# Altium PCB 1tg227.PcbDoc
Units mil, origin at the board's own origin, x right, y up, seen from the top; angles counter-clockwise.
Board outline 3795 x 3305 mil, 2 copper layers (Top Layer, Bottom Layer); 76 components, 54 nets, 275 pads, 570 vias.
Unrouted connection lines stored in the file: 1.
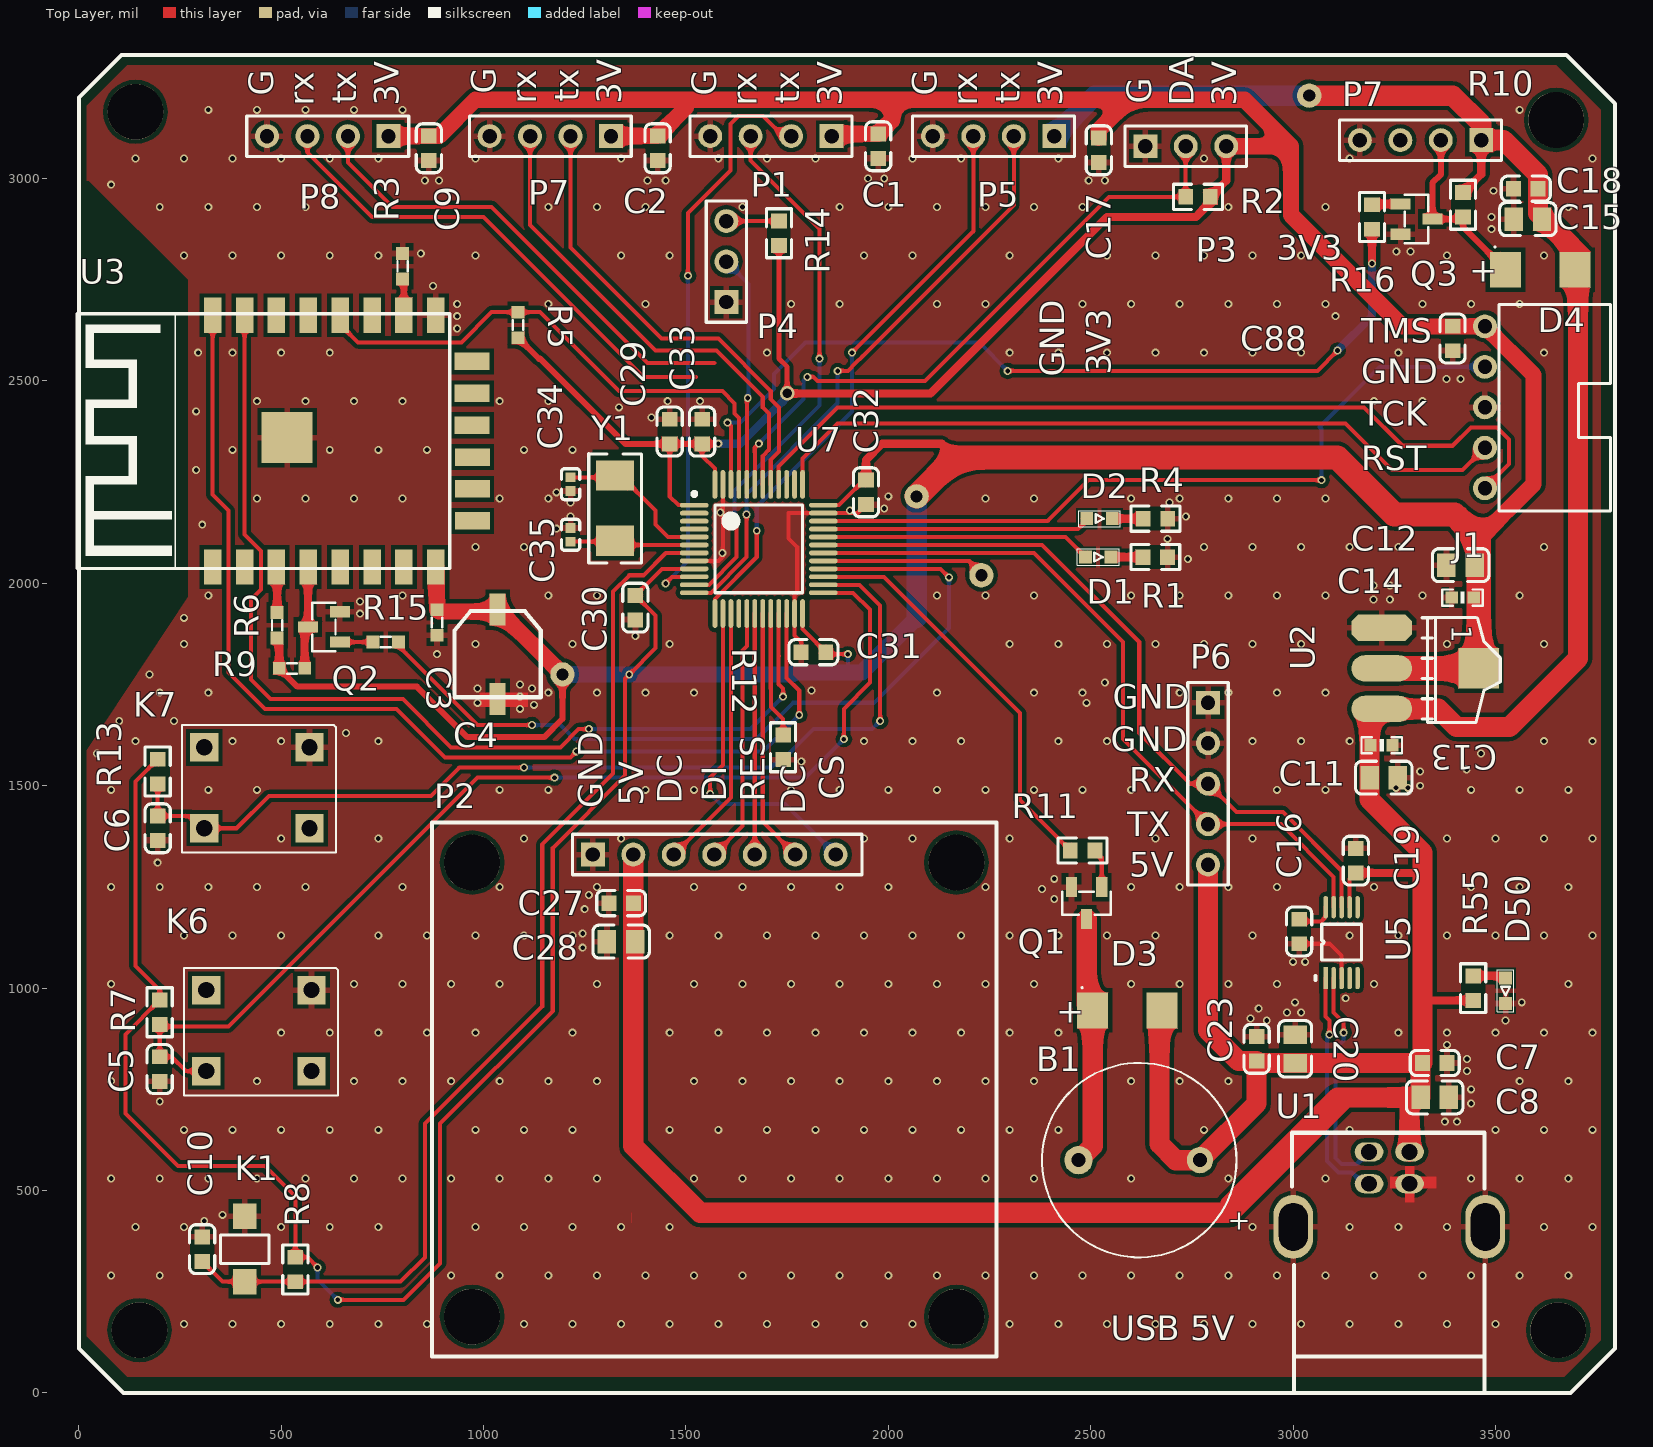
[diagram p0: Top Layer view]
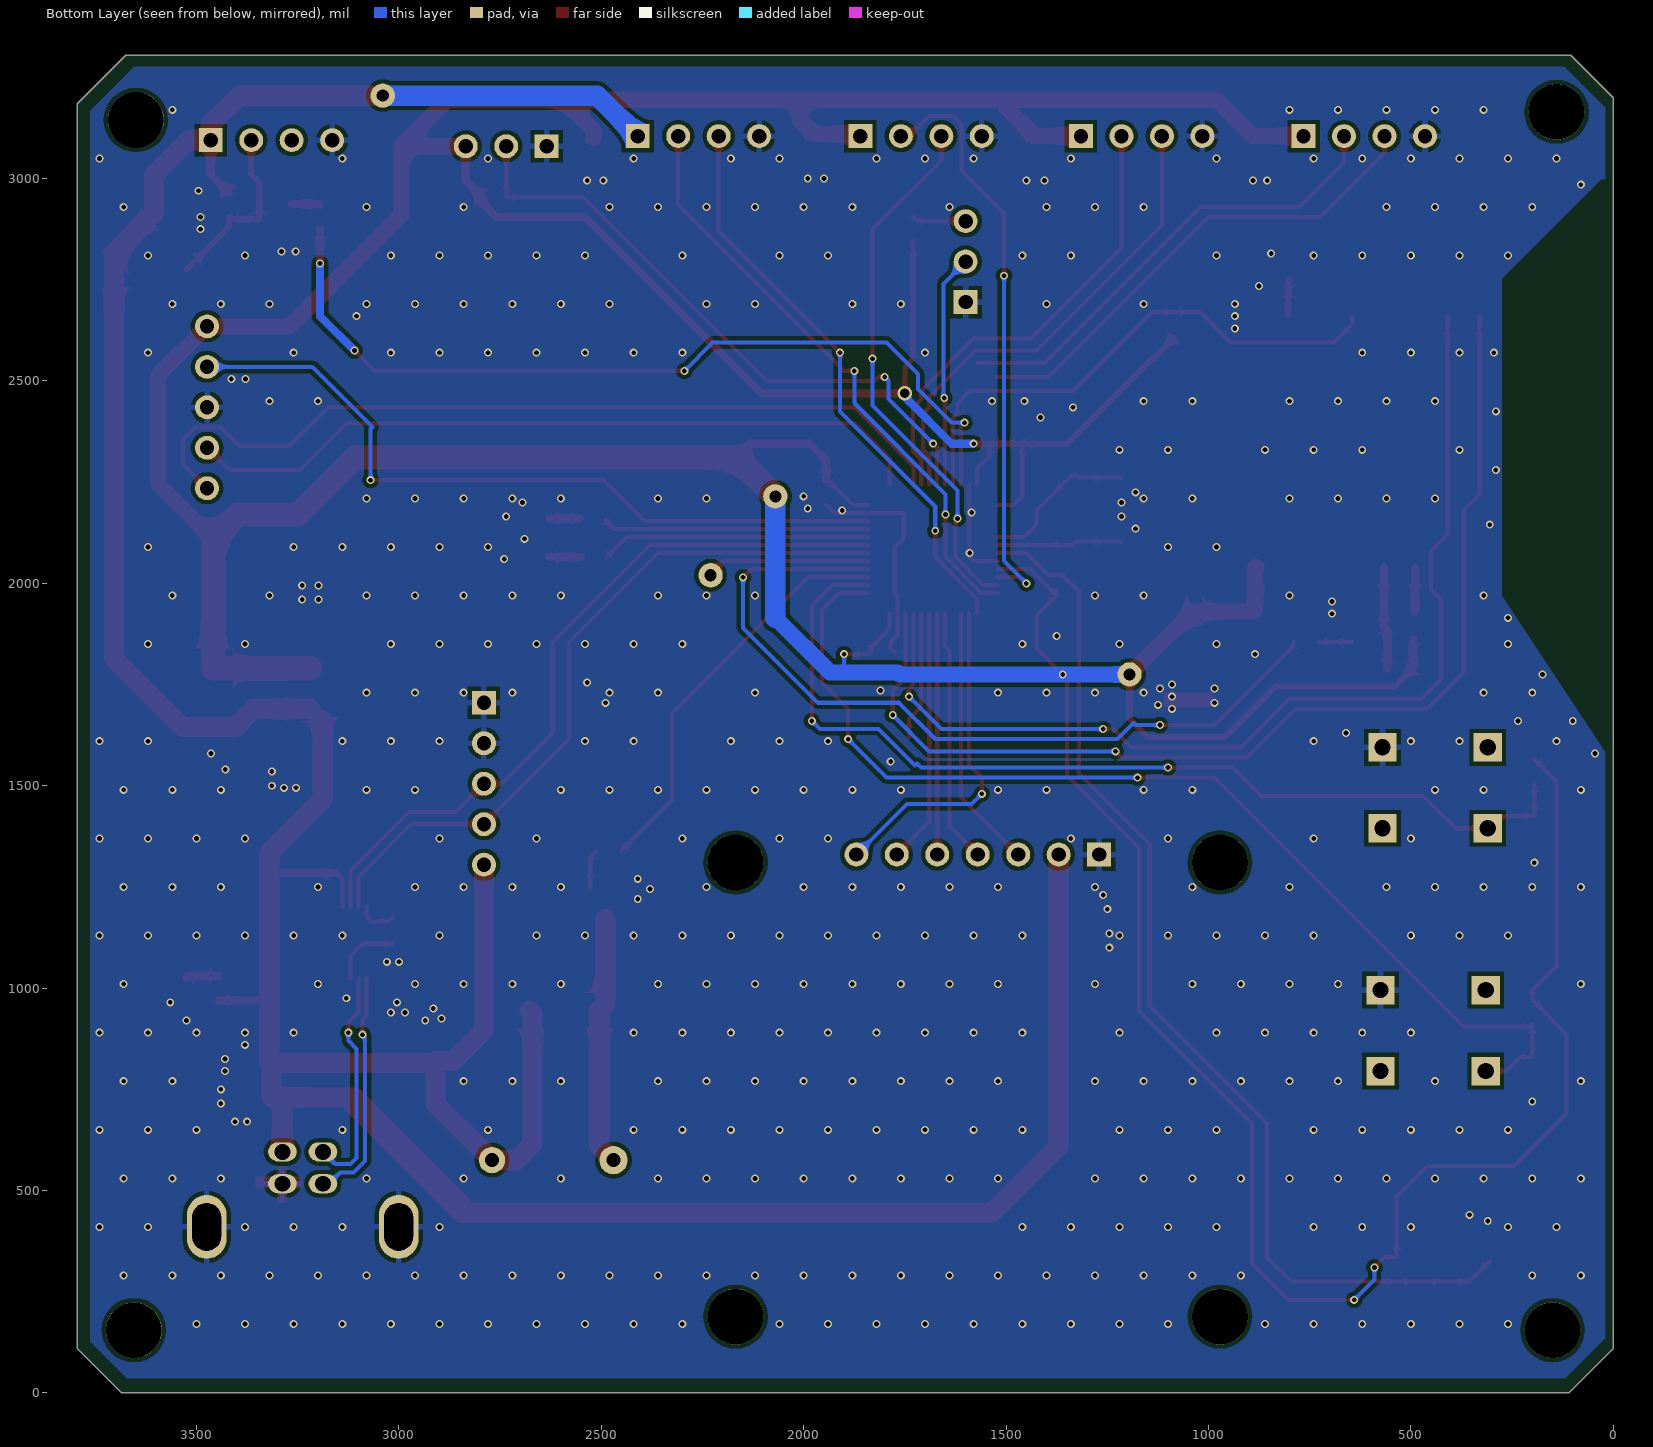
[diagram p1: Bottom Layer view, seen from below]
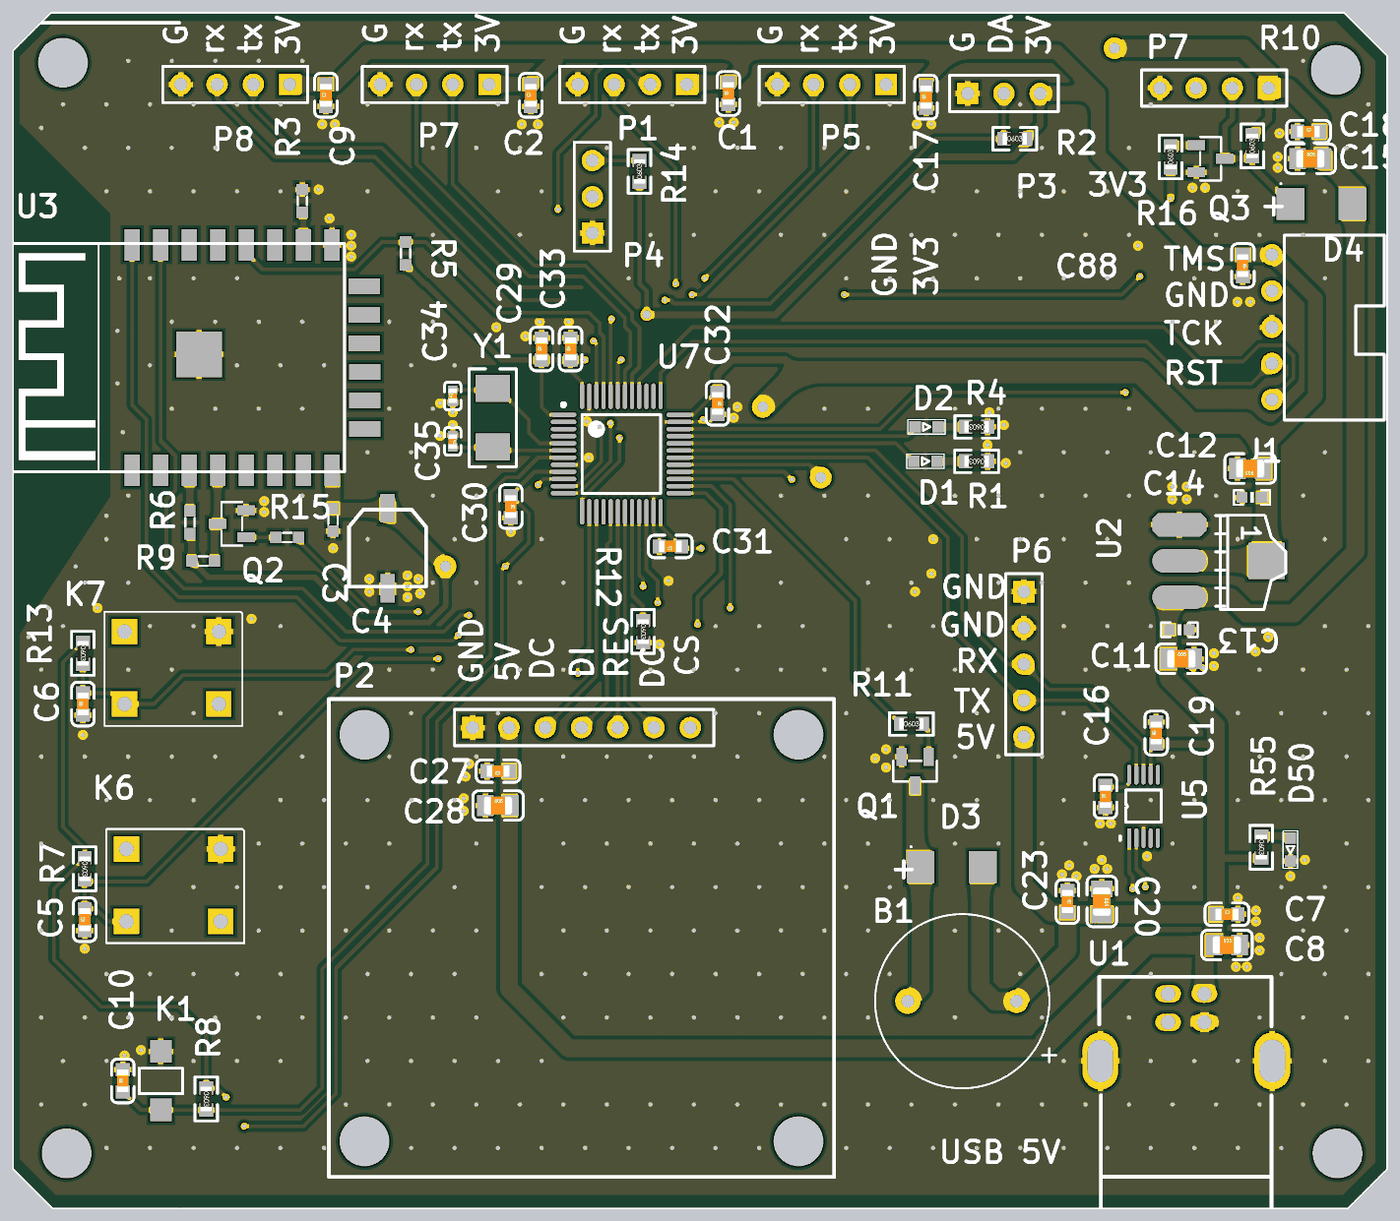
[diagram p2: 3D render of the assembled board from above, using the file's embedded part models]

## Layer stack, top to bottom
Top Solder: solder mask 0.4, Solder Resist, Dk 3.5
Top Layer: signal copper 1.4
Dielectric 1: dielectric 12.6, FR-4, Dk 4.8
Bottom Layer: signal copper 1.4
Bottom Solder: solder mask 0.4, Solder Resist, Dk 3.5

## Board outline
0,110 0,3200 105,3305 3675,3305 3795,3185 3795,110 3685,0 110,0

## Design rules (kind name [scope] priority, off if disabled: settings)
Clearance [All] p1: gap=10 ignorepadtopadclearanceinfootprint=FALSE except(0: Arc-Hole Track-Hole SMDPad-Hole THPad-Hole Via-Hole Fill-Hole Poly-Hole Region-Hole Text-Hole; 6: Arc-Arc Arc-Track Arc-SMDPad Track-Track Track-SMDPad SMDPad-SMDPad)
PolygonConnect [All] p1: thpad.connectstyle=Relief thpad.reliefconductorwidth=15 thpad.reliefentries=4 thpad.polygonreliefangle="90 Angle" thpad.airgapwidth=10 smdpad.connectstyle=Relief smdpad.reliefconductorwidth=15 smdpad.reliefentries=4 smdpad.polygonreliefangle="90 Angle" smdpad.airgapwidth=10 via.connectstyle=Direct via.reliefconductorwidth=10 via.reliefentries=4 via.polygonreliefangle="90 Angle" via.airgapwidth=10
RoutingVias [All] p1: holewidth=28 width=50 viastyle="Through Hole" minholewidth=28 minwidth=50 maxholewidth=28 maxwidth=50
SolderMaskExpansion [All] p1: expansion=4
Width [All] p1: maxlimit=100 minlimit=6 preferedwidth=10
30 further rules are at their usual default settings.

## Components (designator, comment, footprint, x,y, rotation, side; value= is the part's Value field where it differs from the comment)
B1 "Benk" 蜂鸣器 2770,575 r180 top
C1 "CAP_0.1UF_0603_FIRE" LC-0603_C 1975,3080 r90 top value=0.1UF
C2 "CAP_0.1UF_0603_FIRE" LC-0603_C 1430,3075 r90 top value=0.1UF
C3 "CAP_0.1UF_0603_FIRE" CAP_0603_FIRE 885,1872.01 r90 top value=0.1UF
C4 "CAP+_47UF_FIRE" CAP+_47UF_FIRE 1035,1825 r0 top value=47UF
C5 "CAP_0.1UF_0603_FIRE" LC-0603_C 200,800 r90 top value=0.1UF
C6 "CAP_0.1UF_0603_FIRE" LC-0603_C 195,1395 r90 top value=0.1UF
C7 "CAP_0.1UF_0603_FIRE" LC-0603_C 3350,815 r0 top value=0.1UF
C8 "104" LC-0805_C 3350,730 r0 top value=10uF
C9 "CAP_0.1UF_0603_FIRE" LC-0603_C 865,3075 r90 top value=0.1UF
C10 "CAP_0.1UF_0603_FIRE" LC-0603_C 305,355 r90 top value=0.1UF
C11 "104" LC-0805_C 3224.08,1520 r0 top value=10uF
C12 "104" LC-0805_C 3414.08,2045 r180 top value=10uF
C13 "104" 0603P 3219.08,1600 r180 top
C14 "104" 0603P 3419.08,1965 r0 top
C15 "104" LC-0805_C 3580,2900 r0 top value=10uF
C16 "CAP_0.1UF_0603_FIRE" LC-0603_C 3015,1140 r90 top value=0.1UF
C17 "CAP_0.1UF_0603_FIRE" LC-0603_C 2520,3070 r90 top value=0.1UF
C18 "CAP_0.1UF_0603_FIRE" LC-0603_C 3575,2975 r0 top value=0.1UF
C19 "CAP_0.1UF_0603_FIRE" LC-0603_C 3155,1315 r90 top value=0.1UF
C20 "104" LC-0805_C 3005,850 r270 top value=10uF
C23 "CAP_0.1UF_0603_FIRE" LC-0603_C 2910,850 r270 top value=0.1UF
C27 "CAP_0.1UF_0603_FIRE" LC-0603_C 1340,1210 r180 top value=0.1UF
C28 "104" LC-0805_C 1340,1115 r0 top value=10uF
C29 "CAP_0.1UF_0603_FIRE" LC-0603_C 1460,2375 r90 top value=0.1UF
C30 "CAP_0.1UF_0603_FIRE" LC-0603_C 1375,1940 r270 top value=0.1UF
C31 "CAP_0.1UF_0603_FIRE" LC-0603_C 1815,1830 r180 top value=0.1UF
C32 "CAP_0.1UF_0603_FIRE" LC-0603_C 1945,2225 r270 top value=0.1UF
C33 "CAP_0.1UF_0603_FIRE" LC-0603_C 1540,2375 r90 top value=0.1UF
C34 "C_22P_0603" LC-0402_C 1215,2245 r90 top value=20pF
C35 "C_22P_0603" LC-0402_C 1215,2120 r270 top value=20pF
C88 "CAP_0.1UF_0603_FIRE" LC-0603_C 3394.08,2605 r270 top value=0.1UF
D1 "LED_RED_0603_FIRE" LED_RED_0603_FIRE 2487.01,2065 r0 top value=RED
D2 "LED_RED_0603_FIRE" LED_RED_0603_FIRE 2490,2160 r0 top value=RED
D3 "IN5824" DO-214AC(SSxxx) 2595,945 r0 top
D4 "IN5824" DO-214AC(SSxxx) 3615,2775 r0 top
D50 "LED_RED_0603_FIRE" LED_RED_0603_FIRE 3525,1025 r270 top value=RED
J1 "XH2.54-5P" XH2.54-5P 3674.08,2335 r90 top
K1 "KEY" KEY_SW 410,275 r90 top
K6 "方型按键" key 445,895 r0 top
K7 "方型按键" key 440,1495 r0 top
P1 "HC-SR04" HDR1X4 1860,3105 r180 top
P2 "OLED_1.3" OLED_1.3 1270,1330 r0 top
P3 "Header 3" HDR1X3 2635,3080 r0 top
P4 "Header 3" HDR1X3 1600,2695 r90 top
P5 "HC-SR04" HDR1X4 2410,3105 r180 top
P6 "Header 5" HDR1X5 2790,1705 r270 top
P7 "Header 4" HDR1X4 3465,3095 r180 top
P7 "HC-SR04" HDR1X4 1315,3105 r180 top
P8 "HC-SR04" HDR1X4 765,3105 r180 top
Q1 "SI2302_C2891732" SOT-23-3_L2.9-W1.3-P1.90-LS2.4-BR 2490,1210 r90 top
Q2 "SI2302_C2891732" SOT-23-3_L2.9-W1.3-P1.90-LS2.4-BR 605.63,1892.4 r0 top
Q3 "SI2302_C2891732" SOT-23-3_L2.9-W1.3-P1.90-LS2.4-BR 3305,2900 r180 top
R1 "RES" LC-0603_R 2659.69,2065 r180 top value=1k
R2 "RES_10K_0603_FIRE" LC-0603_R 2765,2955 r0 top value=10K
R3 "RES_10K_0603_FIRE" RES_0603_FIRE 800,2815 r270 top value=10K
R4 "RES" LC-0603_R 2660,2160 r180 top value=1k
R5 "RES_10K_0603_FIRE" RES_0603_FIRE 1085,2607.01 r90 top value=10K
R6 "RES_10K_0603_FIRE" RES_0603_FIRE 490,1927.99 r270 top value=10K
R7 "RES" LC-0603_R 200,940.32 r270 top value=10K
R8 "RES_10K_0603_FIRE" LC-0603_R 535,305 r270 top value=10K
R9 "RES_10K_0603_FIRE" RES_0603_FIRE 557.99,1790 r180 top value=10K
R10 "RES" LC-0603_R 3420,2935.31 r90 top value=10k
R11 "RES" LC-0603_R 2480,1340 r0 top value=1k
R12 "RES" LC-0603_R 1740,1595 r270 top value=10k
R13 "RES" LC-0603_R 195,1535 r270 top value=10K
R14 "RES_10K_0603_FIRE" LC-0603_R 1730,2865 r90 top value=10K
R15 "RES_10K_0603_FIRE" RES_0603_FIRE 790,1855 r180 top value=10K
R16 "RES" LC-0603_R 3195,2905 r90 top value=1k
R55 "RES" LC-0603_R 3445,1000 r270 top value=1k
U1 "USB" USB-B 3237.8,595.43 r0 top
U2 "AMS1117-3.3" AMS1117 3219.14,1890.03 r270 top
U3 "ESP12-F" "ESP-12S Module" 606.39,2351.34 r90 top
U5 "CH340E" "SOP10 - duplicate" 3080.63,1024.8 r90 top
U7 "STM32F103C8T6" LQFP48_N 1680,2085 r0 top
Y1 "XTAL_8M_FIRE" OSC_8M 1325,2105 r90 top value=8MHz

## Footprints (in the part's own frame and the unit in brackets; to place one, negate y for a bottom-side part, rotate by r counter-clockwise, add the part's x,y. Pads: shape width x height; smd on the part's side, far side on the other; paste and mask are expansions set on the pad)
0603P [mil]
  rect 30x30 smd: 1(-27,0) 2(27.5,-0.06)
  silkscreen extent -50,-20 50,20
AMS1117 [mil]
  oct 65x150 smd: 1(0.03,-0.06)
  oval 65x150 smd: 2(100.03,-0.06) 3(200.03,-0.06)
  rect 100x100 smd: 4(100.03,239.94)
  silkscreen extent -26,100 234,293
CAP+_47UF_FIRE [mm]
  rect 1x2 smd: 1(0,2.8) 2(0,-2.8)
  silkscreen extent -2.7,-2.7 2.7,2.7
CAP_0603_FIRE [mm]
  rect 0.8x0.8 smd: 1(0,0) 2(1.6,0)
  silkscreen extent 0.5,-0.32 1.1,0.33
DO-214AC(SSxxx) [mm] "SODFL, 2-Leads, Body 2.70x5.45mm, IPC Medium Density"
  rect 1.95x2.25 smd: 1(-2.286,0) 2(2.075,0)
  silkscreen extent -3,1.38 -2.9,1.47, body extent -1.27,-1.42 1.02,1.4, height 2.56
"ESP-12S Module" [mm]
  rect 3.2x3.2 smd: 0(0.22,2.321)
  rect 2.2x1.1 smd: 1(7.9,-7) 2(7.9,-5) 3(7.9,-3) 4(7.9,-1) 5(7.9,1) 6(7.9,3) 7(7.9,5) 8(7.9,7) 9(-7.9,7) 10(-7.9,5) 11(-7.9,3) 12(-7.9,1) 13(-7.9,-1) 14(-7.9,-3) 15(-7.9,-5) 16(-7.9,-7)
  rect 1.1x2.2 smd: 17(-5,-9.297) 18(-3,-9.297) 19(-1,-9.297) 20(1,-9.271) 21(3,-9.271) 22(5,-9.271)
  silkscreen extent -8,-7.87 8,15.5
HDR1X3 [mm] "Connector; Header; 3 Position"
  rect 1.5x1.5 hole 0.9: 1(0,0)
  round 1.5 hole 0.9: 2(2.54,0) 3(5.08,0)
  silkscreen extent -1.27,-1.27 6.35,1.27
HDR1X4 [mm] "Connector; Header; 4 Position"
  rect 1.5x1.5 hole 0.9: 1(0,0)
  round 1.5 hole 0.9: 2(2.54,0) 3(5.08,0) 4(7.62,0)
  silkscreen extent -1.27,-1.27 8.89,1.27
HDR1X5 [mm] "Connector; Header; 5 Position"
  rect 1.5x1.5 hole 0.9: 1(0,0)
  round 1.5 hole 0.9: 2(2.54,0) 3(5.08,0) 4(7.62,0) 5(10.16,0)
  silkscreen extent -1.27,-1.27 11.43,1.27
key [mil]
  rect 70x70 hole 40: 1(-130,100) 2(-130,-100) 3(130,100) 4(130,-100)
  silkscreen extent -185,-160 195,155
KEY_SW [mm]
  rect 1.6x1.5 smd: 1(0,0) 2(4.1,0)
  silkscreen extent 1.14,-1.52 2.92,1.52
LC-0402_C [mm]
  rect 0.6x0.65 smd mask+0.051: 1(-0.425,0) 2(0.425,0)
  silkscreen extent -0.97,-0.58 0.97,0.58, body extent -0.48,-0.3 0.52,0.3, height 0.2
LC-0603_C [mm]
  rect 0.93x0.98 smd: 1(-0.77,0) 2(0.77,0)
  silkscreen extent -1.53,-0.79 1.54,0.79, body extent -0.8,-0.4 0.8,0.4, height 0.3
LC-0603_R [mm]
  rect 0.93x0.98 smd: 1(-0.77,0) 2(0.77,0)
  silkscreen extent -1.53,-0.79 1.54,0.79, body extent -0.85,-0.4 0.85,0.4, height 0.56
LC-0805_C [mm]
  rect 1.16x1.47 smd: 1(-0.89,0) 2(0.89,0)
  silkscreen extent -1.77,-1.04 1.77,1.04, body extent -1,-0.62 1,0.63, height 0.77
LED_RED_0603_FIRE [mm]
  rect 0.8x0.8 smd: A(0,0) K(1.6,0)
  silkscreen extent -0.51,-0.51 2.11,0.51
LQFP48_N [mm] "Thin QFP, 48-Leads, Body 7x7mm, Pitch 0.5mm, IPC Medium Density"
  oval 1.8x0.3 smd: 1(-4.05,2.75) 2(-4.05,2.25) 3(-4.05,1.75) 4(-4.05,1.25) 5(-4.05,0.75) 6(-4.05,0.25) 7(-4.05,-0.25) 8(-4.05,-0.75) 9(-4.05,-1.25) 10(-4.05,-1.75) 11(-4.05,-2.25) 12(-4.05,-2.75) 25(4.05,-2.75) 26(4.05,-2.25) 27(4.05,-1.75) 28(4.05,-1.25) 29(4.05,-0.75) 30(4.05,-0.25) 31(4.05,0.25) 32(4.05,0.75) 33(4.05,1.25) 34(4.05,1.75) 35(4.05,2.25) 36(4.05,2.75)
  oval 0.3x1.8 smd: 13(-2.75,-4.05) 14(-2.25,-4.05) 15(-1.75,-4.05) 16(-1.25,-4.05) 17(-0.75,-4.05) 18(-0.25,-4.05) 19(0.25,-4.05) 20(0.75,-4.05) 21(1.25,-4.05) 22(1.75,-4.05) 23(2.25,-4.05) 24(2.75,-4.05) 37(2.75,4.05) 38(2.25,4.05) 39(1.75,4.05) 40(1.25,4.05) 41(0.75,4.05) 42(0.25,4.05) 43(-0.25,4.05) 44(-0.75,4.05) 45(-1.25,4.05) 46(-1.75,4.05) 47(-2.25,4.05) 48(-2.75,4.05)
  silkscreen extent -4.17,-2.75 2.75,3.57, body extent -3.5,-3.5 3.5,3.5, height 1.6
OLED_1.3 [mm] "Connector; Header; 9 Position"
  round 3.5 hole 3.5 unplated: 0(-7.58,-29) 0(-7.58,-0.5) 0(22.82,-29) 0(22.82,-0.5)
  rect 1.5x1.5 hole 0.9: 1(0,0)
  round 1.5 hole 0.9: 2(2.54,0) 3(5.08,0) 4(7.62,0) 5(10.16,0) 6(12.7,0) 7(15.24,0)
  silkscreen extent -10.08,-31.5 25.32,2
OSC_8M [mm]
  rect 1.9x2.4 smd: 1(0,0) 2(4.1,0)
  silkscreen extent -1.4,-1.65 5.46,1.65
RES_0603_FIRE [mm]
  rect 0.8x0.8 smd: 1(0,0) 2(1.6,0)
  silkscreen extent 0.5,-0.32 1.1,0.33
"SOP10 - duplicate" [mm]
  rect 1.4x0.28 smd: 1(0,0)
  oval 1.4x0.28 smd: 2(0,-0.5) 3(0,-1) 4(0,-1.5) 5(0,-2) 6(4.45,-2) 7(4.45,-1.5) 8(4.45,-1) 9(4.45,-0.5) 10(4.45,0)
  silkscreen extent -0.13,-2.25 3.38,0.64
SOT-23-3_L2.9-W1.3-P1.90-LS2.4-BR [mm]
  rect 1.25x0.7 smd: 1(1,-0.95) 2(1,0.95) 3(-1,0)
  silkscreen extent -0.73,-1.53 0.73,1.53
USB-B [mm]
  oval 1.8x1.2 hole 1: 1(1.27,0) 2(-1.27,0) 3(-1.27,-2) 4(1.27,-2)
  oval 2.5x4 hole 1.8 slot 3 at 90 deg: 5(-6.025,-4.71) 6(6.025,-4.71)
  silkscreen extent -6.1,-15.13 5.97,1.2
XH2.54-5P [mm]
  round 1.5 hole 0.9: 1(-2.54,5.08) 2(0,5.08) 3(2.54,5.08) 4(5.08,5.08) 5(7.62,5.08)
  silkscreen extent -3.96,-2.79 8.99,4.21
蜂鸣器 [mil]
  round 65 hole 35: 1(0,0)
  round 70 hole 35: 2(300,0)
  silkscreen extent -90,-240 390,240

## Part data
C1 C2 C3 C5 C6 C7 C9 C10 C16 C17 C18 C19 C23 C27 C29 C30 C31 C32 C33 C88: "SURFACE MOUNT CAPACITOR 0.031 X 0.061 INCHES", PCB DECAL=CAP_0603_FIRE
C8 C11 C12 C15 C20 C28: library part Cap, "Capacitor", LatestRevisionDate=17-Jul-2002, LatestRevisionNote="Re-released for DXP Platform.", PackageDescription="Radial Cap, Thru-Hole; 2 Leads; 0.3 in Pin Spacing", PackageReference=RAD-0.3, Published=8-Jun-2000, Publisher="Altium Limited"
C13 C14: library part C
C34 C35: library part CAP_0.1UF_0603_FIRE, "SURFACE MOUNT CAPACITOR 0.031 X 0.061 INCHES", PCB DECAL=CAP_0603_FIRE
D1 D2 D50: "red,0805", PCB DECAL=LED_RED_0603_FIRE
K6 K7: library part Component_1
P1 P5 P7 P8: library part "Header 4", "Header, 4-Pin", LatestRevisionDate=17-Jul-2002, LatestRevisionNote="Re-released for DXP Platform.", Publisher="Altium Limited"
P3 P4: "Header, 3-Pin", LatestRevisionDate=17-Jul-2002, LatestRevisionNote="Re-released for DXP Platform.", Publisher="Altium Limited"
P6: "Header, 5-Pin", LatestRevisionDate=17-Jul-2002, LatestRevisionNote="Re-released for DXP Platform.", Publisher="Altium Limited"
P7: "Header, 4-Pin", LatestRevisionDate=17-Jul-2002, LatestRevisionNote="Re-released for DXP Platform.", Publisher="Altium Limited"
Q1 Q2 Q3: BOM_JLCPCB Part Class="Extended Part", BOM_Manufacturer=YONGYUTAI(永裕泰), BOM_Manufacturer Part=SI2302, BOM_Supplier=LCSC, BOM_Supplier Part=C2891732, Contributor=LCSC, spicePre=Q, spiceSymbolName=SI2302_C2891732
R2 R3 R5 R6 R8 R9 R14 R15: "SURFACE MOUNT RESISTOR 0.031 X 0.061 INCHES, 1/10W", Assembly=SMD, PCB DECAL=RES_0603_FIRE
U1: library part USB-B
U2: library part AMS1117
U7: "STM32 ARM-based 32-bit MCU Performance Line with 64 kB Flash, 20 kB Internal RAM, -40 to +85癈 Temperature, 48-Pin LQFP, Tray", ComponentLink1Description="Manufacturer URL", ComponentLink1URL=http://www.st.com/, ComponentLink2Description="STM32F103 Datasheet", ComponentLink2URL=http://www.st.com/internet/com/TECHNICAL_RESOURCES/TECHNICAL_LITERATURE/DATASHEET/CD00161566.pdf, ComponentLink3Description="STM32 Family Web Page", ComponentLink3URL=www.st.com/stm32, DatasheetVersion="rev13.0, Apr-2011", PackageDescription="48-Pin Low-Profile Quad Flat Pack, 7 x 7 mm Body, 0.5 mm Pitch (LQFP48)", PackageReference=LQFP48, PackageVersion="rev13, Apr-2011"
Y1: "CRYSTAL", PCB DECAL=CRYSTAL_SMD_FIRE
C4: PCB DECAL=CAP+_47UF_FIRE
J1: PCB DECAL=XH2.54-5P

## Free pads (board coordinates)
  round 137.8 hole 137.8 unplated: 0(140,3165) 0(150,155) 0(3650,3145) 0(3655,155)
  round 60 hole 30: 1(2070,2215) 1(2230,2020) 1(3040,3205) 2(1195,1775)

## Via types
v1: diameter 19.68, hole 11.81, Top Layer to Bottom Layer, tented both sides, 440 vias
v2: diameter 19.68, hole 11.81, Top Layer to Bottom Layer, 129 vias
v3: diameter 35.43, hole 23.62, Top Layer to Bottom Layer, 1 vias

## Nets (pads, with @x,y where several pads share a name; then routed paths per layer and width w, separated by ;. In a path a pad name is that pad's centre, name@x,y a point inside that pad or via, vN(x,y) a via of type N, cw(c..) or ccw(c..) an arc to the next point about the centre after c; other vN are vias at no path point)
beek: R11.1 U7.27 | length 1016.4
  Top Layer w10: U7.27 1988.9,2016.1 2325,1680 2325,1464.69 R11.1
BOOT0: P4.2 U7.44 | length 579.7
  Top Layer w10: U7.44 1650.47,2455.47 v2(1652.74,2457.74)
  Bottom Layer w10: P4.2 1655,2740 1655,2457.74 1652.74,2455.47 v2(1652.74,2457.74)
DHT11: P3.2 R2.1 U7.43 | length 1571.8
  Top Layer w10: U7.43 1670.16,2324.84 1670,2325 1670,2335 v2(1680,2345) ; v2(1800,2510) 1815,2510 1824.84,2500.16 2090.16,2500.16 2545,2955 R2.1 2734.69,3079.69 P3.2
  Bottom Layer w10: v2(1680,2345) 1790,2455 1790,2500 v2(1800,2510)
Echo_1: P1.3 U7.11 | length 1312.2
  Top Layer w10: U7.11 1556.55,1996.42 1625,2064.87 1625,2155 v2(1620,2160) ; P1.3@1660,3085 1660,3045 1830,2875 v2(1830,2555)
  Bottom Layer w10: v2(1620,2160) 1620,2230 1830,2440 v2@1830,2554.84
Echo_3: P7.3@1115,3105 U7.42 | length 1199.1
  Top Layer w10: P7.3@1115,3105 1115,2885 1425,2575 1575,2575 1689.84,2460.16 1689.84,2435 1705,2419.84 1705,2330.16 1689.84,2315 U7.42
Echo_4: P8.3 | length 1229.9
  Top Layer w10: P8.3 565,3065 725,2905 1000,2905 1395,2510 1525,2510
GND: C1.1 C2.1 C3.1 C4.2 C5.1 C6.1 C7.2 C8.2 C9.1 C10.2 C11.2 C12.2 C13.1 C14.1 C15.1 C16.1 C17.1 C18.1 C19.2 C20.1 C23.1 C27.2 C28.1 C29.2 C30.2 C31.2 C32.2 C33.2 C34.1 C35.1 C88.2 D50.K J1.3 K1.2 K6.3 K7.3 P1.4 P2.1 P3.1 P4.1 P5.4 P6.1 P6.2 P7.4 P8.4 Q1.2 Q2.2 Q3.2 R1.1 R3.1 R4.1 R12.2 U1.4 U1.5 U1.6 U2.1 U3.0 U3.1 U5.3 U7.8 U7.23 U7.35 U7.47 | length 992.8
  Top Layer w10: U7.8 1521.02,2055 1580,2055 1591.42,2066.42 U7.47 ; C31.2@1774.37,1830 1785,1840.63 1785,1855 1768.58,1871.42 U7.23 1768.58,1971.3 1775,1977.71 1775,2090 1753.58,2111.42 1753.58,2173.58 U7.35 1923.9,2173.58 C32.2 ; C16.1 3090.31,1109.68 3120,1080 U5.3
  other v1: 260,170 380,170 500,170 620,170 740,170 860,170 1100,170 1220,170 1340,170 1460,170 1580,170 1700,170 1820,170 1940,170 2060,170 2300,170 2420,170 2540,170 2660,170 2780,170 2900,170 3020,170 3140,170 3260,170 3380,170 3500,170 80,290 200,290 920,290 1040,290 1160,290 1280,290 1400,290 1520,290 1640,290 1760,290 1880,290 2000,290 2120,290 2240,290 2360,290 2480,290 2600,290 2720,290 2840,290 2960,290 3080,290 3200,290 3320,290 3440,290 3560,290 3680,290 140,410 260,410 500,410 620,410 740,410 980,410 1100,410 1220,410 1340,410 1460,410 2900,410 3140,410 3260,410 3380,410 3620,410 3740,410 80,530 200,530 320,530 440,530 560,530 680,530 800,530 920,530 1040,530 1160,530 1280,530 1520,530 1640,530 1760,530 1880,530 2000,530 2120,530 2240,530 2360,530 2600,530 2840,530 3080,530 3440,530 3560,530 3680,530 260,650 380,650 500,650 620,650 740,650 980,650 1100,650 1220,650 1460,650 1580,650 1700,650 1820,650 1940,650 2060,650 2180,650 2300,650 2420,650 2780,650 3140,650 3500,650 3620,650 3740,650 80,770 440,770 680,770 800,770 920,770 1040,770 1160,770 1280,770 1520,770 1640,770 1760,770 1880,770 2000,770 2120,770 2240,770 2360,770 2600,770 2720,770 2840,770 3560,770 3680,770 500,890 620,890 740,890 860,890 980,890 1220,890 1460,890 1580,890 1700,890 1820,890 1940,890 2060,890 2180,890 2300,890 2420,890 3260,890 3380,890 3500,890 3620,890 3740,890 80,1010 680,1010 800,1010 920,1010 1040,1010 1280,1010 1520,1010 1640,1010 1760,1010 1880,1010 2000,1010 2120,1010 2240,1010 2360,1010 2600,1010 2720,1010 2840,1010 2960,1010 3200,1010 3680,1010 260,1130 380,1130 500,1130 740,1130 860,1130 980,1130 1100,1130 1220,1130 1460,1130 1580,1130 1700,1130 1820,1130 1940,1130 2060,1130 2180,1130 2300,1130 2420,1130 2540,1130 2660,1130 2900,1130 3140,1130 3260,1130 3380,1130 3500,1130 3620,1130 3740,1130 80,1250 200,1250 320,1250 440,1250 560,1250 800,1250 1040,1250 1280,1250 1520,1250 1640,1250 1760,1250 1880,1250 2000,1250 2240,1250 2600,1250 2720,1250 2840,1250 2960,1250 3200,1250 3440,1250 3560,1250 3680,1250 500,1370 740,1370 1100,1370 1340,1370 1940,1370 2060,1370 2300,1370 2660,1370 2900,1370 3380,1370 3500,1370 3620,1370 3740,1370 80,1490 320,1490 440,1490 1040,1490 1160,1490 1400,1490 1520,1490 1760,1490 1880,1490 2000,1490 2120,1490 2240,1490 2360,1490 2480,1490 2600,1490 2960,1490 3080,1490 3440,1490 3560,1490 3680,1490 45,1580 140,1610 380,1610 500,1610 740,1610 1940,1610 2060,1610 2180,1610 2420,1610 2540,1610 2900,1610 3020,1610 3140,1610 3620,1610 3740,1610 100,1660 200,1730 320,1730 1160,1730 1280,1730 1400,1730 1520,1730 2120,1730 2360,1730 2480,1730 2720,1730 2840,1730 2960,1730 3080,1730 175,1775 260,1850 980,1850 1220,1850 1460,1850 2300,1850 2420,1850 2660,1850 2780,1850 2900,1850 3020,1850 3380,1850 3620,1850 260,1915 320,1970 800,1970 1160,1970 1280,1970 2120,1970 2240,1970 2360,1970 2600,1970 2720,1970 2840,1970 2960,1970 3080,1970 3320,1970 3560,1970 980,2090 1100,2090 2780,2090 2900,2090 3020,2090 3140,2090 3260,2090 3620,2090 305,2145 440,2210 560,2210 680,2210 800,2210 1040,2210 1160,2210 2240,2210 2360,2210 2600,2210 2720,2210 2840,2210 2960,2210 3080,2210 290,2280 380,2330 620,2330 740,2330 860,2330 1100,2330 1220,2330 290,2425 440,2450 560,2450 680,2450 800,2450 1040,2450 1160,2450 3200,2450 3320,2450 295,2570 380,2570 500,2570 620,2570 1700,2570 2300,2570 2420,2570 2540,2570 2660,2570 2780,2570 2900,2570 3020,2570 3260,2570 3620,2570 1160,2690 1400,2690 1760,2690 1880,2690 2120,2690 2240,2690 2480,2690 2600,2690 2720,2690 2840,2690 2960,2690 3080,2690 3320,2690 3440,2690 3560,2690 260,2810 380,2810 500,2810 620,2810 740,2810 980,2810 1340,2810 1460,2810 1940,2810 2060,2810 2300,2810 2540,2810 2660,2810 2780,2810 2900,2810 3020,2810 3380,2810 3620,2810 200,2930 320,2930 440,2930 560,2930 1160,2930 1280,2930 1400,2930 1640,2930 1880,2930 2000,2930 2120,2930 2240,2930 2360,2930 2480,2930 2840,2930 3080,2930 3680,2930 80,2985 140,3050 260,3050 380,3050 500,3050 620,3050 740,3050 980,3050 1340,3050 1580,3050 1700,3050 1820,3050 2060,3050 2180,3050 2420,3050 2780,3050 3140,3050 3740,3050 320,3170 440,3170 560,3170 680,3170 800,3170 3560,3170
  other v2: 310,425 355,440 3375,670 3405,670 3440,715 200,720 3440,750 3430,795 3430,825 3380,860 2935,920 3525,920 2895,925 2985,940 3020,940 2915,950 3005,965 3565,965 3130,975 3000,1065 3030,1065 1245,1100 1245,1135 1250,1195 2410,1220 1260,1230 2380,1245 2410,1270 195,1310 3254.08,1495 3284.08,1495 3314.08,1500 3314.08,1535 3429.08,1540 1785,1560 3464.08,1580 660,1630 235,1660 1090,1690 1125,1700 985,1705 2490,1705 1090,1720 1810,1735 985,1740 1120,1740 1090,1750 2535,1755 885,1825 2540,1850 1375,1870 695,1925 695,1955 3199.08,1960 3239.08,1960 3199.08,1995 3239.08,1995 2740,2060 1590,2075 2690,2110 1180,2135 1215,2165 2735,2165 1585,2175 1905,2180 1990,2185 1215,2200 2695,2200 2000,2215 1180,2225 1415,2410 1335,2435 1455,2450 1535,2450 3379.08,2505 3414.08,2505 935,2630 935,2660 3105,2660 935,2690 875,2735 845,2815 3255,2820 3290,2820 3490,2875 3490,2905 3495,2970 855,2995 890,2995 1405,2995 1450,2995 2495,2995 2535,2995 1950,3000 1990,3000
humi_pwm: R16.1 U7.46 | length 2151.3
  Top Layer w10: v2(1603.05,2396.95) 1611.1,2388.9 U7.46 ; v2(2295,2525) 3060,2525 v2(3110,2575)
  Top Layer w20: v2(3195,2790) R16.1
  Bottom Layer w10: v2(1603.05,2396.95) 1634.58,2396.95 1717.28,2479.66 1717.28,2517.28 1794.84,2594.84 2225.16,2594.84 v2(2295,2525)
  Bottom Layer w20: v2(3110,2575) 3195,2660 v2(3195,2790)
KEY_5: C5.2 K6.2 R7.2 U7.25 | length 2673.2
  Top Layer w10: R7.2 R7.2@200,905 ; K6.2 265,795 229.68,830.32 C5.2 R7.2@200,905 ; v2(1175,1520) 985,1520 370,905 R7.2@200,905 ; U7.25 1913.27,1976.73 1955,1935 1955,1755 1890.13,1690.13 v2(1890.13,1615)
  Bottom Layer w10: v2(1175,1520) 1795.13,1520 v2(1890.13,1615)
KEY_6: C6.2 K7.2 R13.2 U7.26 | length 2437.7
  Top Layer w10: R13.2 C6.2 279.68,1425.32 K7.2 390,1395 470,1475 870,1475 940,1545 v2(1100,1545) ; U7.26 1928.58,1996.42 1980,1945 v2(1980,1660)
  Bottom Layer w10: v2(1100,1545) 1710,1545 1720,1555 1725,1550 1815,1640 1960,1640 v2(1980,1660)
LED1: D1.A U7.32 | length 668.1
  Top Layer w10: U7.32 2437.48,2114.53 D1.A
LED2: D2.A U7.33 | length 659.2
  Top Layer w10: U7.33 2469.21,2134.21 D2.A@2490,2155
LED3: pad.1@2230,2020 U7.29 | length 396.1
  Top Layer w10: U7.29 2199.53,2055.47 pad.1@2225,2030
NetB1_2: B1.2 D3.1 Q1.3 | length 616.3
  Top Layer w50: B1.2 2505,610 D3.1 2490,960 Q1.3
NetC16_2: C16.2 U5.10 | length 98.7
  Top Layer w10: C16.2@3015,1175.32 3025.31,1165 3070,1165 3080.63,1175.63 U5.10
NetD1_K: D1.K R1.2 | length 79.4
  Top Layer w20: D1.K R1.2
NetD2_K: D2.K R4.2 | length 76.7
  Top Layer w20: D2.K R4.2
NetD4_1: D4.1 P7.2@3365,3095 Q3.3 R10.1 | length 454.7
  Top Layer w10: R10.1@3415,2900 R10.1
  Top Layer w15: P7.2@3365,3095 3365,3010 3344.37,2989.37 Q3.3 R10.1@3415,2900 ; R10.1 3420,2880 D4.1
NetD50_A: D50.A R55.1 | length 82.2
  Top Layer w20: R55.1 3519.69,1030.31 D50.A
NetP4_3: P4.3 R14.2 | length 134.3
  Top Layer w10: P4.3 1719.68,2895 R14.2@1730,2905.32
NetQ1_1: Q1.1 R11.2 | length 97.7
  Top Layer w10: R11.2 2527.4,1322.91 Q1.1
NetQ2_1: Q2.1 R15.2 | length 82
  Top Layer w10: Q2.1 R15.2
NetQ2_3: Q2.3 R9.1 U3.9 U3.12 | length 254.1
  Top Layer w10: Q2.3@557.99,1884.13 Q2.3 ; U3.12@566.26,2039.56 U3.12
  Top Layer w20: R9.1 Q2.3@557.99,1884.13 ; Q2.3 U3.12@566.26,2039.56
NetQ3_1: Q3.1 R16.2 | length 71.5
  Top Layer w20: R16.2 3197.09,2937.4 Q3.1
NetR3_2: R3.2 U3.2 | length 89
  Top Layer w15: R3.2@800,2750 803.24,2746.76 U3.2
NetR6_1: R6.1 U3.11 | length 113
  Top Layer w10: U3.11 U3.11@490,2038.6
  Top Layer w20: R6.1 U3.11@490,2038.6
NetR12_1: R12.1 U7.20 | length 318.2
  Top Layer w10: U7.20 1709.53,1740.79 1710,1740.31 1710,1695 1740,1665 R12.1 R12.1@1740,1620
NRST: C10.1 K1.1 R8.2 U7.7 | length 2673.3
  Top Layer w10: C10.1 354.68,275 K1.1 410.32,274.68 R8.2 794.68,274.68 855,335 855,665 1145,955 1145,1355 1320,1530 1320,1980 1360,2020 1395,2020 1450.16,2075.16 U7.7
OLED_CS: P2.7 U7.14 | length 830.7
  Top Layer w10: v2(1560,1480) 1560,1520 1591.42,1551.42 U7.14
  Bottom Layer w10: v2(1560,1480) 1585,1455 1745,1455 P2.7
OLED_DC: P2.6 U7.19 | length 628.8
  Top Layer w10: U7.19 1689.84,1410.16 P2.6
OLED_DI: P2.4 U7.17 | length 628.9
  Top Layer w10: P2.4 1640,1400 1640,1834.53 1650.47,1845 U7.17
OLED_DO: P2.3 U7.15 | length 654
  Top Layer w10: P2.3 1611.1,1471.1 U7.15
OLED_RES: P2.5 U7.18 | length 595.6
  Top Layer w10: P2.5 1670,1925.39 U7.18
OSC_IN: C34.2 U7.5 Y1.2 | length 390.9
  Top Layer w10: C34.2 1320.32,2261.73 Y1.2 1338.58,2266.42 1425,2180 1425,2145 1455.47,2114.53 U7.5
OSC_OUT: C35.2 U7.6 Y1.1 | length 310.5
  Top Layer w10: C35.2 1323.27,2103.27 Y1.1 1335.16,2094.84 U7.6
RESET: J1.1 U7.40 | length 2125
  Top Layer w10: U7.40 1729.21,2289.21 1875,2435 3175,2435 3270,2340 3394.08,2340 3439.08,2385 3504.08,2385 3533.78,2355.29 3533.78,2294.71 J1.1
SPI_MISO: U7.16
TCK: J1.2 U7.37 | length 1856
  Top Layer w10: U7.37 1788.27,2308.27 1875,2395 3130,2395 3245,2280 3419.08,2280 J1.2
TMS: J1.4 U7.34 | length 1876.3
  Top Layer w10: U7.34 2393.9,2153.9 2495,2255 v2(3070,2255)
  Bottom Layer w10: v2(3070,2255) 3070,2380.92 3065,2385.92 3214.08,2535 J1.4
Trig_1: P1.2 U7.10 | length 1465.8
  Top Layer w10: v2(1450,2000) 1466.1,2016.1 U7.10 ; v2(1505,2760) 1505,2915 1610,3020 1610,3135 1630,3155 1690,3155 P1.2@1760,3085
  Bottom Layer w10: v2(1450,2000) 1505,2055 v2(1505,2760)
Trig_3: P7.2@1215,3105 U7.41 | length 1164.4
  Top Layer w10: P7.2@1215,3105 1215,2830 1440,2605 1580,2605 1709.53,2475.47 1709.53,2455 1730,2434.53 1730,2325.47 1709.53,2305 U7.41
Trig_4: P8.2 | length 1175
  Top Layer w10: P8.2 665,3040 775,2930 1020,2930 1405,2545 1570,2545
UD+: U1.3 U5.1 | length 585.1
  Top Layer w10: U5.1 3080.63,929.37 3090,920 v2(3090,885)
  Bottom Layer w10: v2(3090,885) 3084,879 3084,573.37 3112.37,545 3145,545 3173.31,516.69 U1.3
UD-: U1.2 U5.2 | length 564.9
  Top Layer w10: U5.2 3100.31,939.68 3125,915 v2(3125,890)
  Bottom Layer w10: v2(3125,890) 3125,870 3105,850 3105,580 3120,565 3157.36,565 U1.2
USART1_RX: P6.3 U5.8 U7.31 | length 1835.7
  Top Layer w10: U7.31 2380.16,2094.84 2620,1855 2620,1630 2745,1505 P6.3 2860,1435 2975,1435 3120,1290 U5.8
USART1_TX: P6.4 U5.9 U7.30 | length 1817.3
  Top Layer w10: U7.30 2359.84,2075.16 2580,1855 2580,1615 P6.4 2970,1405 3100,1275 3100,1250 ; U5.9 3100.31,1259.68
USART2_RX: P5.3 U7.13 | length 1443.8
  Top Layer w10: U7.13 1571.73,1961.73 1675,2065 v2(1675,2130) ; v2(1910,2570) 2210,2870 P5.3
  Bottom Layer w10: v2(1675,2130) 1675,2190 1910,2425 v2(1910,2570)
USART2_TX: P5.2 U7.12 | length 1494.1
  Top Layer w10: U7.12 1561.73,1976.73 1650,2065 v2(1650,2170) ; v2(1875,2525) 1900,2525 1920.16,2545.16 1920.29,2545.16 1934.84,2559.71 1934.84,2559.84 2310,2935 P5.2
  Bottom Layer w10: v2(1650,2170) 1650,2220 1875,2445 v2(1875,2525)
VCC3V3: C1.2 C2.2 C3.2 C4.1 C9.2 C12.1 C14.2 C17.2 C29.1 C30.1 C31.1 C32.1 C33.1 C88.1 J1.5 P1.1 P3.3 P7.1@1315,3105 P8.1 pad.1@2070,2215 pad.2 R2.2 R5.1 R6.2 R7.1 R8.1 R9.2 R13.1 R14.1 U2.2 U2.4 U3.16 U7.1 U7.9 U7.24 U7.36 U7.48 | length 16960.1
  Top Layer w10: R13.1 140,1510.31 140,1055 200,995 ; R7.1 115,885.63 115,690 245,560 460,560 535,485 R8.1 564.69,335.31 v2(590,310) ; R6.2 R6.2@495,1860 ; v2@645,230 802.63,230 892.63,320 892.63,665 1171,943.37 1171,1346 1350,1525 1350,1765 v2(1360,1775) 1425,1840 1425,1920.32 C30.1 ; C29.1 1460,2215 1481.73,2193.27 U7.1 ; U7.9 1440.47,2035.79 C30.1@1379.84,1975.16 ; C33.1 1540,2315 1571.73,2283.27 U7.48 ; U7.24 1788.27,1886.73 1835,1840 C31.1@1835,1830 ; C31.1@1835.32,1830 1840.32,1825 v2(1900,1825) ; U7.36 1878.27,2193.27 1940.31,2255.32 C32.1 ; C30.1 C30.1@1379.84,1975.16 ; C30.1 1375,1980 C30.1@1379.84,1975.16
  Top Layer w12: R7.1 200,995 ; R14.1@1730,2844.69 R14.1 1730,2555 1750,2535 v3(1750,2470)
  Top Layer w15: R9.2 540,1745 835,1745 960,1620 1150,1620 1195,1665 pad.2 ; R5.1 1137.01,2555 1140,2555 1350.32,2344.68 C29.1 ; C29.1@1454.68,2350 C29.1 ; v2(1580,2345) 1579.68,2344.68 C33.1 C29.1
  Top Layer w20: R9.2 R6.2@495,1860 ; v3(1750,2470) 1750.84,2469.16 2104.16,2469.16 2540,2905 2760,2905 2795.32,2940.32 R2.2 2835,2994.68 P3.3 ; C32.1 1945,2305 1985,2345 2132,2345 2166,2311
  Top Layer w40: P8.1 C9.2@880,3105 ; C9.2 890.32,3105.31 980,3195 1500,3195 ; U3.16 885,2037.3 C3.2 889.76,1930.24 1040,1930.24 1040,1930 pad.2 ; P7.1@1315,3105 1315.32,3105.31 C2.2 1500,3175.31 1500,3195 ; P1.1 1865.32,3110.31 C1.2 2010,3145.31 2010,3195 ; C17.2 2520,3120 2595,3195 ; P3.3 2995,3080 ; 3459.08,2110 3594.08,2245 3594.08,2515 J1.5 3389.39,2635 3389.08,2634.68 3270.31,2634.68 2995,2910 2995,3080 ; 1500,3195 2010,3195 ; 2010,3195 2595,3195 ; 2595,3195 2880,3195 2995,3080
  Top Layer w60: pad.1@2070,2215 2166,2311 3109,2311 3250,2170 3399.08,2170 3459.08,2110 U2.4 U2.2
  Bottom Layer w10: v2(590,310) 590,280 v2(640,230) ; v2(1900,1825) 1900,1800 1905,1795
  Bottom Layer w20: v2(1580,2345) 1635,2345 1750,2460 v3(1750,2470) ; 1767.8,1780 1777.64,1789.84
  Bottom Layer w40: pad.2 v2(1360,1775) 1762.8,1775 1767.8,1780 1935,1780 2070,1915
  Bottom Layer w50: 2070,1915 pad.1@2070,2215
VCC5V: B1.1 C7.1 C8.1 C11.1 C13.2 C15.2 C18.2 C19.1 C20.2 C23.2 C27.1 C28.2 D3.2 D4.2 P2.2 P5.1 P6.5 P7.1@3465,3095 pad.1@3040,3205 R10.2 R55.2 U1.1 U2.3 U5.7 | length 9924.6
  Top Layer w10: U5.7 3139.69,1269.37 C19.1
  Top Layer w20: C19.1 3310,1284.68 3319.69,1275 ; 3319.69,970 3320,969.68 R55.2 ; R10.2 3465,3010.63 P7.1@3465,3095
  Top Layer w40: C13.2@3189.08,1600.06 C13.2@3189.08,1610 ; C13.2 3191.58,1662.5 U2.3
  Top Layer w50: P2.2 1370,610 1535,445 2845,445 ; D3.2 2670,938.31 2670,615 2710,575 B1.1 2910,715 C23.2 ; P6.5 2790,895 2865.31,819.68 C23.2 ; pad.1@3040,3205 3395,3205 3465,3135 P7.1@3465,3105 ; C13.2@3189.08,1600.06 3189.08,1465.92 3319.69,1335.32 3319.69,1275 3319.69,970 C7.1 C7.1@3319.65,814.96 ; C13.2@3189.08,1610 3189.08,1660 U2.3@3191.58,1662.5 ; U2.3 3359.08,1690 3404.08,1645 3534.08,1645 3704.08,1815 3704.08,2815.92 3605.32,2914.68 C18.2 3605.32,3009.68 3520,3095 3465,3095 P7.1@3465,3105 ; U1.1 3287.8,707.87 C8.1@3309.92,730 ; C8.1@3314.92,735 C8.1@3309.92,730 ; P7.1@3469.79,3098.55 P7.1@3465,3105 ; 2845,445 3130,730 ; 2845,445 2845,465 3110,730 3130,730 ; C23.2 2914.72,814.96 C20.2 C7.1@3319.65,814.96 ; 3130,730 C8.1@3309.92,730 ; C8.1@3309.92,730 C8.1 3314.96,810.28 C7.1@3319.65,814.96
  Bottom Layer w50: P5.1 2510,3205 pad.1@3040,3205
WIFI_EN: R5.2 U3.4 U7.45 | length 1345
  Top Layer w10: U3.4 645.76,2639.24 690,2595 945,2595 1020,2670 R5.2 1140,2670 1335.16,2474.84 1590.16,2474.84 1620.16,2444.84 1620.16,2419.71 1630.79,2409.08 U7.45
WIFI_RST: R15.1 U7.28 | length 2027.5
  Top Layer w10: R15.1 790,1845 985,1650 v2(1120,1650) ; U7.28 2129.21,2035.79 v2(2150,2015)
  Bottom Layer w10: v2(1120,1650) 1180,1650 1185,1655 1225,1615 1675,1615 1765,1705 1965,1705 2150,1890 v2(2150,2015)
WIFI_URXD: U3.8 U7.22 | length 2702.5
  Top Layer w10: U3.8 330.8,2219.2 370,2180 370,1780 460,1690 785,1690 905,1570 1215,1570 v2(1230,1585) ; U7.22 1748.9,1766.1 1780,1735 v2(1780,1675)
  Bottom Layer w10: v2(1230,1585) 1690,1585 v2(1780,1675)
WIFI_UTXD: U3.7 U7.21 | length 2574
  Top Layer w10: U3.7 409.54,2120.83 450,2080.37 450,1985 425,1960 425,1762.95 474.13,1713.81 801.19,1713.81 920,1595 1190,1595 1235,1640 v2(1260,1640) ; U7.21 1729.21,1820.79 ; 1730,1820 1729.21,1820.79 ; v2(1740,1720) 1740,1740 1729.21,1750.79 1729.21,1820.79
  Bottom Layer w10: v2(1260,1640) 1660,1640 v2(1740,1720)
pads on no net: K6.1 K6.4 K7.1 K7.4 P2.0 P7.3@3265,3095 U3.3 U3.5 U3.6 U3.10 U3.13 U3.14 U3.15 U3.17 U3.18 U3.19 U3.20 U3.21 U3.22 U5.4 U5.5 U5.6 U7.2 U7.3 U7.4 U7.38 U7.39

## Polygon pours and split planes (outlines as drawn)
GND on Bottom Layer "Top Layer-No Net" (solid, remove dead copper, pour order 4): 121.46,3276.46 3653.54,3276.46 3762.8,3167.2 3762.8,126.46 3672.8,36.46 118.54,36.46 20,135 20,3175
GND on Top Layer "Top Layer-No Net" (solid, remove dead copper, pour order 0): 120,3280 3650,3280 3760,3170 3760,130 3670,40 120,40 20,140 20,3180

## Other copper
Top Layer:
  rectangle net GND: 3275.98,470 3300,560.13
  rectangle net GND: 3240,505 3355,535
  rectangle net GND: 990,1695 1110,1730
  pour cut-out: 1255,2310 1255,2090 1285,2060 1380,2060 1411.63,2091.63 1411.63,2213.37 1395,2230 1395,2315 1380,2330 1270,2330 1270,2325
  pour cut-out: 270,1967.04 270,2750 25,2995 5,2995 5,1564.63
Bottom Layer:
  pour cut-out: 275,1970 275,2752.96 30,2997.96 10,2997.96 10,1567.59

## Silkscreen, mask and mechanical layers (free items; w line width, h text height)
Top Overlay:
  the board outline again, w10
  text "G" at 1030,3210 h60 r90
  text "G" at 480,3205 h60 r90
  text "G" at 1575,3205 h60 r90
  text "G" at 2120,3205 h60 r90
  text "tx" at 1235,3190 h60 r90
  text "tx" at 685,3185 h60 r90
  text "rx" at 1130,3185 h60 r90
  text "3V" at 1340,3185 h60 r90
  text "tx" at 1780,3185 h60 r90
  text "tx" at 2325,3185 h60 r90
  text "G" at 2650,3185 h60 r90
  text "rx" at 580,3180 h60 r90
  text "3V" at 790,3180 h60 r90
  text "rx" at 1675,3180 h60 r90
  text "3V" at 1885,3180 h60 r90
  text "rx" at 2220,3180 h60 r90
  text "3V" at 2430,3180 h60 r90
  text "DA" at 2755,3180 h60 r90
  text "3V" at 2860,3180 h60 r90
  text "3V3" at 2960,2800 h60
  text "TMS" at 3169.08,2595 h60
  text "3V3" at 2550,2515 h60 r90
  text "GND" at 2435,2510 h60 r90
  text "GND" at 3169.08,2495 h60
  text "TCK" at 3169.08,2390 h60
  text "RST" at 3169.08,2280 h60
  text "GND" at 2555,1690 h60
  text "GND" at 2550,1585 h60
  text "RX" at 2595,1485 h60
  text "CS" at 1890,1465 h60 r90
  text "DI" at 1600,1460 h60 r90
  text "RES" at 1695,1460 h60 r90
  text "DC" at 1490,1455 h60 r90
  text "5V" at 1395,1450 h60 r90
  text "GND" at 1295,1445 h60 r90
  text "DC" at 1795,1430 h60 r90
  text "TX" at 2590,1375 h60
  text "5V" at 2595,1275 h60
  text "USB 5V" at 2550,130 h60

## Dimensions
460,3275 to 110,0 on Top Overlay
0,3200 to 3795,3185 on Top Overlay

## Text inside footprints (layer, text, board x,y; h text height)
B1: Top Overlay "+" at 2895,445 h50 r180
D3: Top Overlay "+" at 2415,915 h60
D4: Top Overlay "+" at 3435,2745 h60
U2: Top Overlay "1" at 3392.08,1896 h50 r270